# Altium PCB PCB1.pcbdoc
Units mil, origin at the board's own origin, x right, y up, seen from the top; angles counter-clockwise.
Board outline 2035 x 900 mil, 2 copper layers (Top Layer, Bottom Layer), stack 62.206 mil thick; 12 components, 9 nets, 31 pads, 27 vias.
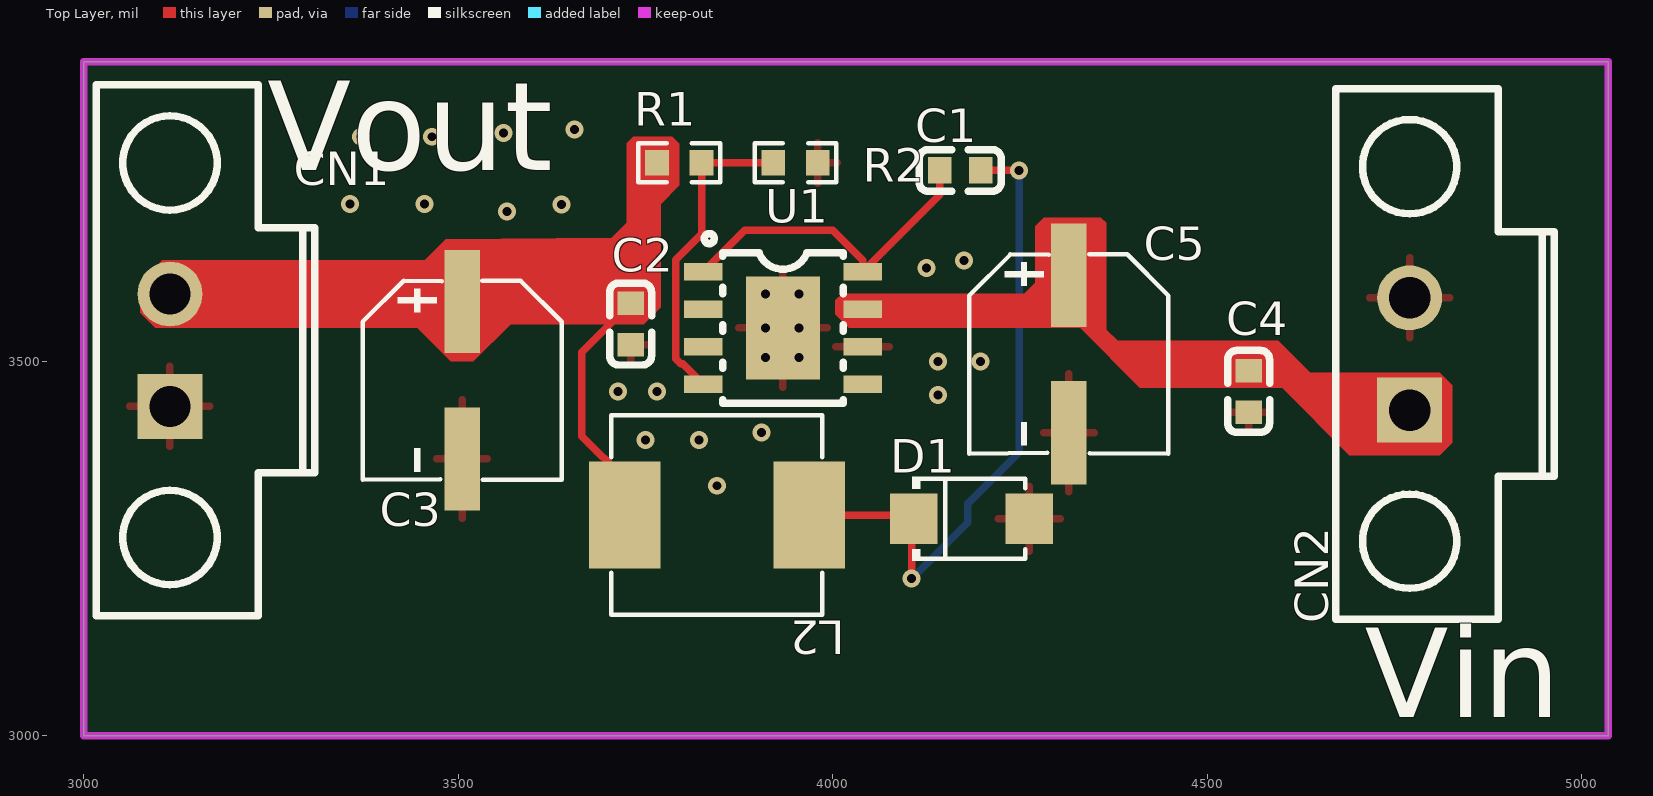
[diagram p0: Top Layer view]
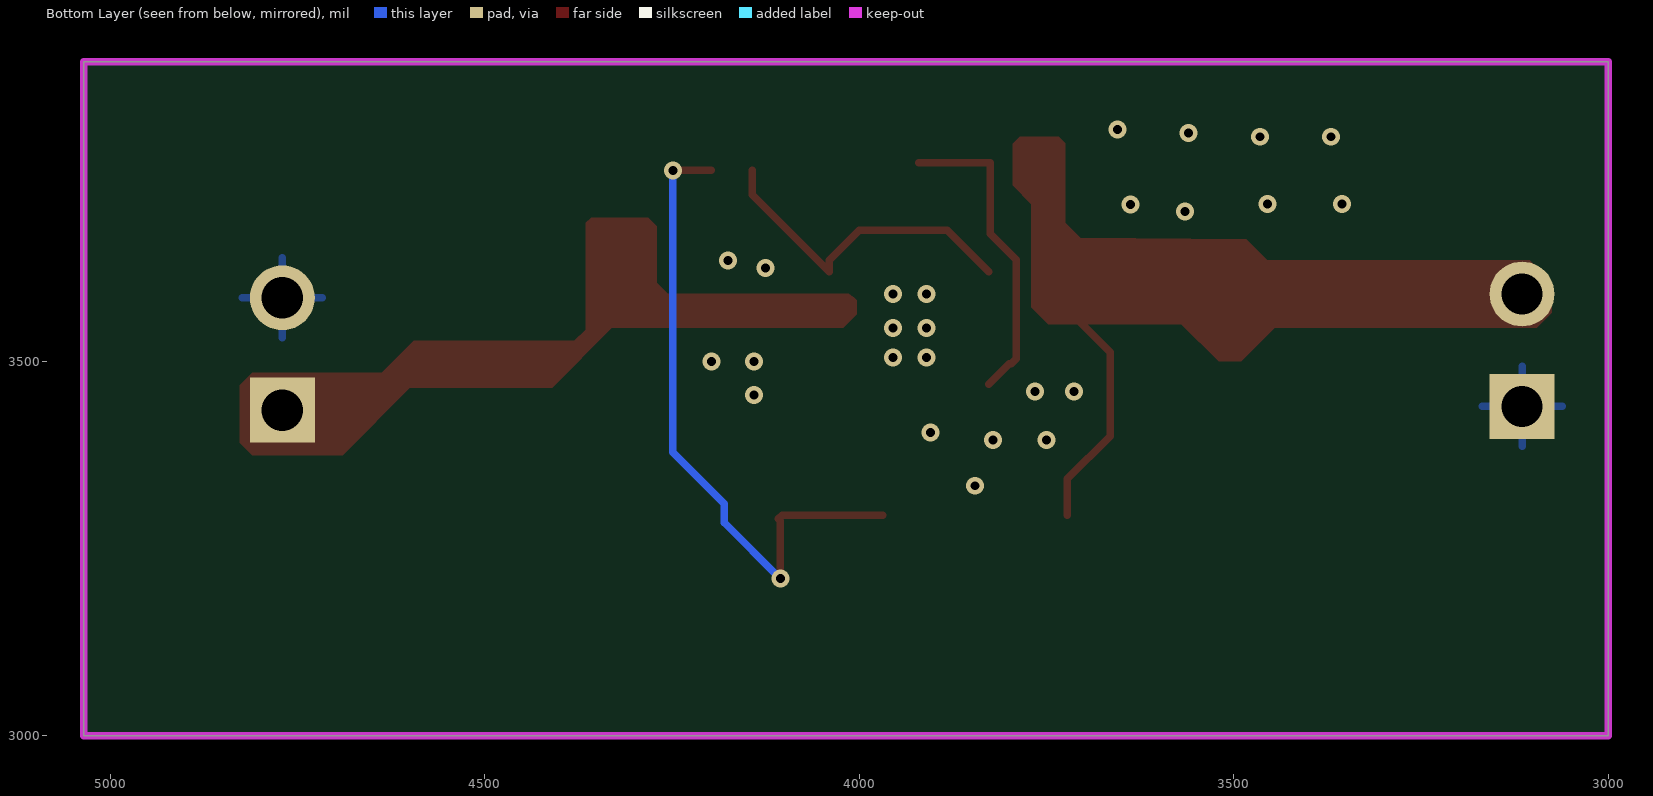
[diagram p1: Bottom Layer view, seen from below]

## Layer stack, top to bottom
Top Solder Mask Layer: solder mask 0.394, Dk 3.3
Top Layer: signal copper 1.379
Dielectric1: surface 59.449, FR4, Dk 4.5
Bottom Layer: signal copper 1.378
Bottom Solder Mask Layer: solder mask 0.394, Dk 3.3

## Board outline
3000,3900 3000,3000 5035,3000 5035,3900

## Design rules (kind name [scope] priority, off if disabled: settings)
BoardOutlineClearance copperThickness1oz [All] p0: genericclearance=10 ignorepadtopadclearanceinfootprint=FALSE except(0: Arc-SplitContinuation Track-SplitContinuation SMDPad-SplitContinuation THPad-SplitContinuation Via-SplitContinuation Fill-SplitContinuation Poly-SplitContinuation Region-SplitContinuation Text-SplitContinuation)
BoardOutlineClearance copperThickness2oz [All] p0: genericclearance=10 ignorepadtopadclearanceinfootprint=FALSE except(0: Arc-SplitContinuation Track-SplitContinuation SMDPad-SplitContinuation THPad-SplitContinuation Via-SplitContinuation Fill-SplitContinuation Poly-SplitContinuation Region-SplitContinuation Text-SplitContinuation)
BoardOutlineClearance otherClearance [All] p0: genericclearance=10 ignorepadtopadclearanceinfootprint=FALSE except(0: Arc-SplitContinuation Track-SplitContinuation SMDPad-SplitContinuation THPad-SplitContinuation Via-SplitContinuation Fill-SplitContinuation Poly-SplitContinuation Region-SplitContinuation Text-SplitContinuation)
Clearance copperThickness1oz [All] p1: gap=7 ignorepadtopadclearanceinfootprint=FALSE
Clearance copperThickness2oz [All] p1: gap=7 ignorepadtopadclearanceinfootprint=FALSE
Clearance otherClearance [All] p1: gap=7 ignorepadtopadclearanceinfootprint=FALSE
DiffPairsRouting differentialPair [All] p1: maxuncoupledlength=10 minlimit=6 maxlimit=Infinity mostfreqgap=6 toplayer_minwidth=5 toplayer_prefwidth=10 toplayer_maxwidth=100 bottomlayer_minwidth=5 bottomlayer_prefwidth=10 bottomlayer_maxwidth=100
PasteMaskExpansion pasteMaskExpansion [All] p1: expansion=0
PlaneConnect innerPlane [All] p1: planeconnectstyle=Relief reliefexpansion=20 reliefentries=4 reliefconductorwidth=10 reliefairgap=10
PolygonConnect copperRegion [All] p1: connectstyle=Relief reliefentries=4 reliefconductorwidth=10 polygonreliefangle="90 Angle" airgapwidth=10
RoutingVias viaSize [All] p1: viastyle="Through Hole" holewidth=12.0078 minholewidth=11.811 maxholewidth=248.0314 width=12.0078 minwidth=11.811 maxwidth=248.0314
SolderMaskExpansion solderMaskExpansion [IsVia] p1: useseparateexpansions=TRUE expansion=-1000 expansionbottom=-1000
SolderMaskExpansion solderMaskExpansion [All] p2: useseparateexpansions=TRUE expansion=2 expansionbottom=2
Width copperThickness1oz [All] p1: maxlimit=100 minlimit=5 preferedwidth=10
Width copperThickness2oz [All] p1: maxlimit=100 minlimit=8 preferedwidth=10

## Components (designator, comment, footprint, x,y, rotation, side; value= is the part's Value field where it differs from the comment)
C1 "10nF" C0603 4170,3755 r0 top
C2 "100nF" C0603 3730,3550 r90 top
C3 "220uF" CAP-SMD_BD6.3-L6.6-W6.6-LS7.3-FD 3505,3475 r270 top
C4 "100nF" C0603 4555,3460 r90 top
C5 "220uF" CAP-SMD_BD6.3-L6.6-W6.6-LS7.3-FD 4315,3510 r270 top
CN1 "LAIL-PTB3.81-2P-GN-02S-ZC" CONN-TH_LAIL-PTB3.81-2P-GN-02S-ZC 3115,3515 r90 top
CN2 "LAIL-PTB3.81-2P-GN-02S-ZC" CONN-TH_LAIL-PTB3.81-2P-GN-02S-ZC 4770,3510 r90 top
D1 "SB34AFC_R1_00001" SMAF_L3.5-W2.6-LS4.7-RD 4185,3290 r0 top
L2 "15uH" IND-SMD_L7.0-W6.6_FXL0630 3845,3295 r180 top
R1 "10K" R0603 3795,3765 r180 top
R2 "10K" R0603 3950,3765 r180 top
U1 "TPS5430DDAR" ESOP-8_L4.9-W3.9-P1.27-LS6.0-TL-EP 3933.34,3544.72 r0 top

## Footprints (in the part's own frame and the unit in brackets; to place one, negate y for a bottom-side part, rotate by r counter-clockwise, add the part's x,y. Pads: shape width x height; smd on the part's side, far side on the other; paste and mask are expansions set on the pad)
C0603 [mm]
  rect 0.8x0.9 smd: 1(-0.7,0) 2(0.7,0)
  silkscreen extent -1.39,-0.71 1.39,0.71
CAP-SMD_BD6.3-L6.6-W6.6-LS7.3-FD [mm]
  rect 3.5x1.2 smd: 1(-2.67,0) 2(2.67,0)
  silkscreen extent -3.38,-3.38 3.38,3.38
CONN-TH_LAIL-PTB3.81-2P-GN-02S-ZC [mm]
  rect 2.2x2.2 hole 1.4 paste+0 mask+0.051: 1(-1.905,0)
  round 2.2 hole 1.4 paste+0 mask+0.051: 2(1.905,0)
  silkscreen extent -9,-4.91 9,2.5
ESOP-8_L4.9-W3.9-P1.27-LS6.0-TL-EP [mm]
  rect 1.3x0.6 smd: 1(-2.7,1.905) 2(-2.7,0.635) 3(-2.7,-0.635) 4(-2.7,-1.905) 5(2.7,-1.905) 6(2.7,-0.635) 7(2.7,0.635) 8(2.7,1.905)
  rect 2.5x3.5 smd: 9(0,0)
  silkscreen extent -2.67,-2.55 2.05,3.2
IND-SMD_L7.0-W6.6_FXL0630 [mm]
  rect 2.424x3.62 smd: 1(3.128,0) 2(-3.128,0)
  silkscreen extent -3.58,-3.38 3.58,3.38
R0603 [mil]
  rect 31.75x34.02 smd paste-3937.01 mask+2: 1(-29.66,0) 2(29.66,0)
  silkscreen extent -55,-26 55,26
SMAF_L3.5-W2.6-LS4.7-RD [mm]
  rect 1.6x1.7 smd: 1(-1.96,0) 2(1.96,0)
  silkscreen extent -2.01,-1.43 1.83,1.42

## Via types
v1: diameter 24.02, hole 12, Top Layer to Bottom Layer, 27 vias

## Nets (pads, with @x,y where several pads share a name; then routed paths per layer and width w, separated by ;. In a path a pad name is that pad's centre, name@x,y a point inside that pad or via, vN(x,y) a via of type N, cw(c..) or ccw(c..) an arc to the next point about the centre after c; other vN are vias at no path point)
$1N1: C1.1 U1.1 U1.8 | length 445.4
  Top Layer w10: U1.1 3882.32,3675 4000,3675 4039.64,3635.36 U1.8 4142.44,3722.53 C1.1
$1N2: C1.2 D1.1 L2.2 | length 878.5
  Top Layer w10: L2.2 4102.84,3295 D1.1 4105,3287.16 v1(4105,3210) ; C1.2 v1(4248.66,3755)
  Bottom Layer w10: v1(4105,3210) 4180,3285 4180,3310 4248.66,3378.66 v1(4248.66,3755)
$1N4: R1.1 R2.2 U1.4 | length 422
  Top Layer w10: U1.4 3799.84,3496.93 3796.91,3496.93 3790.47,3503.36 3790.47,3636.09 3824.66,3670.27 R1.1 R2.2
GND: C2.1 C3.2 C4.1 C5.2 CN1.1 CN2.2 D1.2 R2.1 U1.6 U1.9
  other v1: 3845,3334.07 3750,3395 3820.95,3395 3905,3405 4140,3455 3713.28,3460 3765,3460 4140,3500 4197.1,3500 3910,3505 3955,3505 3910,3545 3955,3545 3910,3590 3955,3590 4125,3625 4175,3635 3565,3700 3355,3710 3455,3710 3637.92,3709.54 3370,3800 3465,3800 3560,3805 3655,3810
NET1: U1.5
Vin: C4.2 C5.1 CN2.1 U1.7
VIN: 
Vout: C2.2 C3.1 CN1.2 L2.1 R1.2 | length 333
  Top Layer w10: L2.1 3721.85,3343.15 3665,3400 3665,3512.56 C2.2
VOUT: 
pads on no net: U1.2 U1.3

## Polygon pours and split planes (outlines as drawn)
GND on Bottom Layer (solid, remove dead copper, pour order 2): 3000,3900 3000,3000 5035,3000 5035,3900
GND on Top Layer (solid, remove dead copper, pour order 0): 3007.56,3900 3007.56,3000 5042.94,3000 5042.94,3900

## Keep-outs
Board Outline Layer:
  the board outline again, w10

## Other copper
Top Layer:
  region net VIN: 4014.05,3590.64 4255.64,3590.64 4270,3605 4270,3680.84 4281.26,3692.1 4357.9,3692.1 4365,3685 4365,3542.51 4380,3527.51 4594.61,3527.51 4637.12,3485 4810,3485 4826.77,3468.23 4826.77,3391.77 4810,3375 4689.62,3375 4599.62,3465 4410,3465 4330,3545 4021.03,3545 4003,3563.04 4003,3582.03 4006.32,3585.35
  region net VOUT: 3733.43,3800 3785.45,3800 3795,3790.45 3795,3735 3770,3710 3770,3572.44 3747.56,3550 3570,3550 3520,3500 3490,3500 3445,3545 3095,3545 3075,3565 3075,3605 3105,3635 3455,3635 3483.43,3663.43 3705,3665 3724.86,3684.86 3724.58,3791.15

## Silkscreen, mask and mechanical layers (free items; w line width, h text height)
Top Silkscreen Layer:
  text "Vout" at 3245,3755 h120
  text "Vin" at 4710,3025 h120